# Altium PCB PCB1.PcbDoc
Units mm, origin at the board's own origin, x right, y up, seen from the top; angles counter-clockwise.
Board outline 65.15 x 80.26 mm, 2 copper layers (Top Layer, Bottom Layer); 8 components, 32 nets, 52 pads, 0 vias.
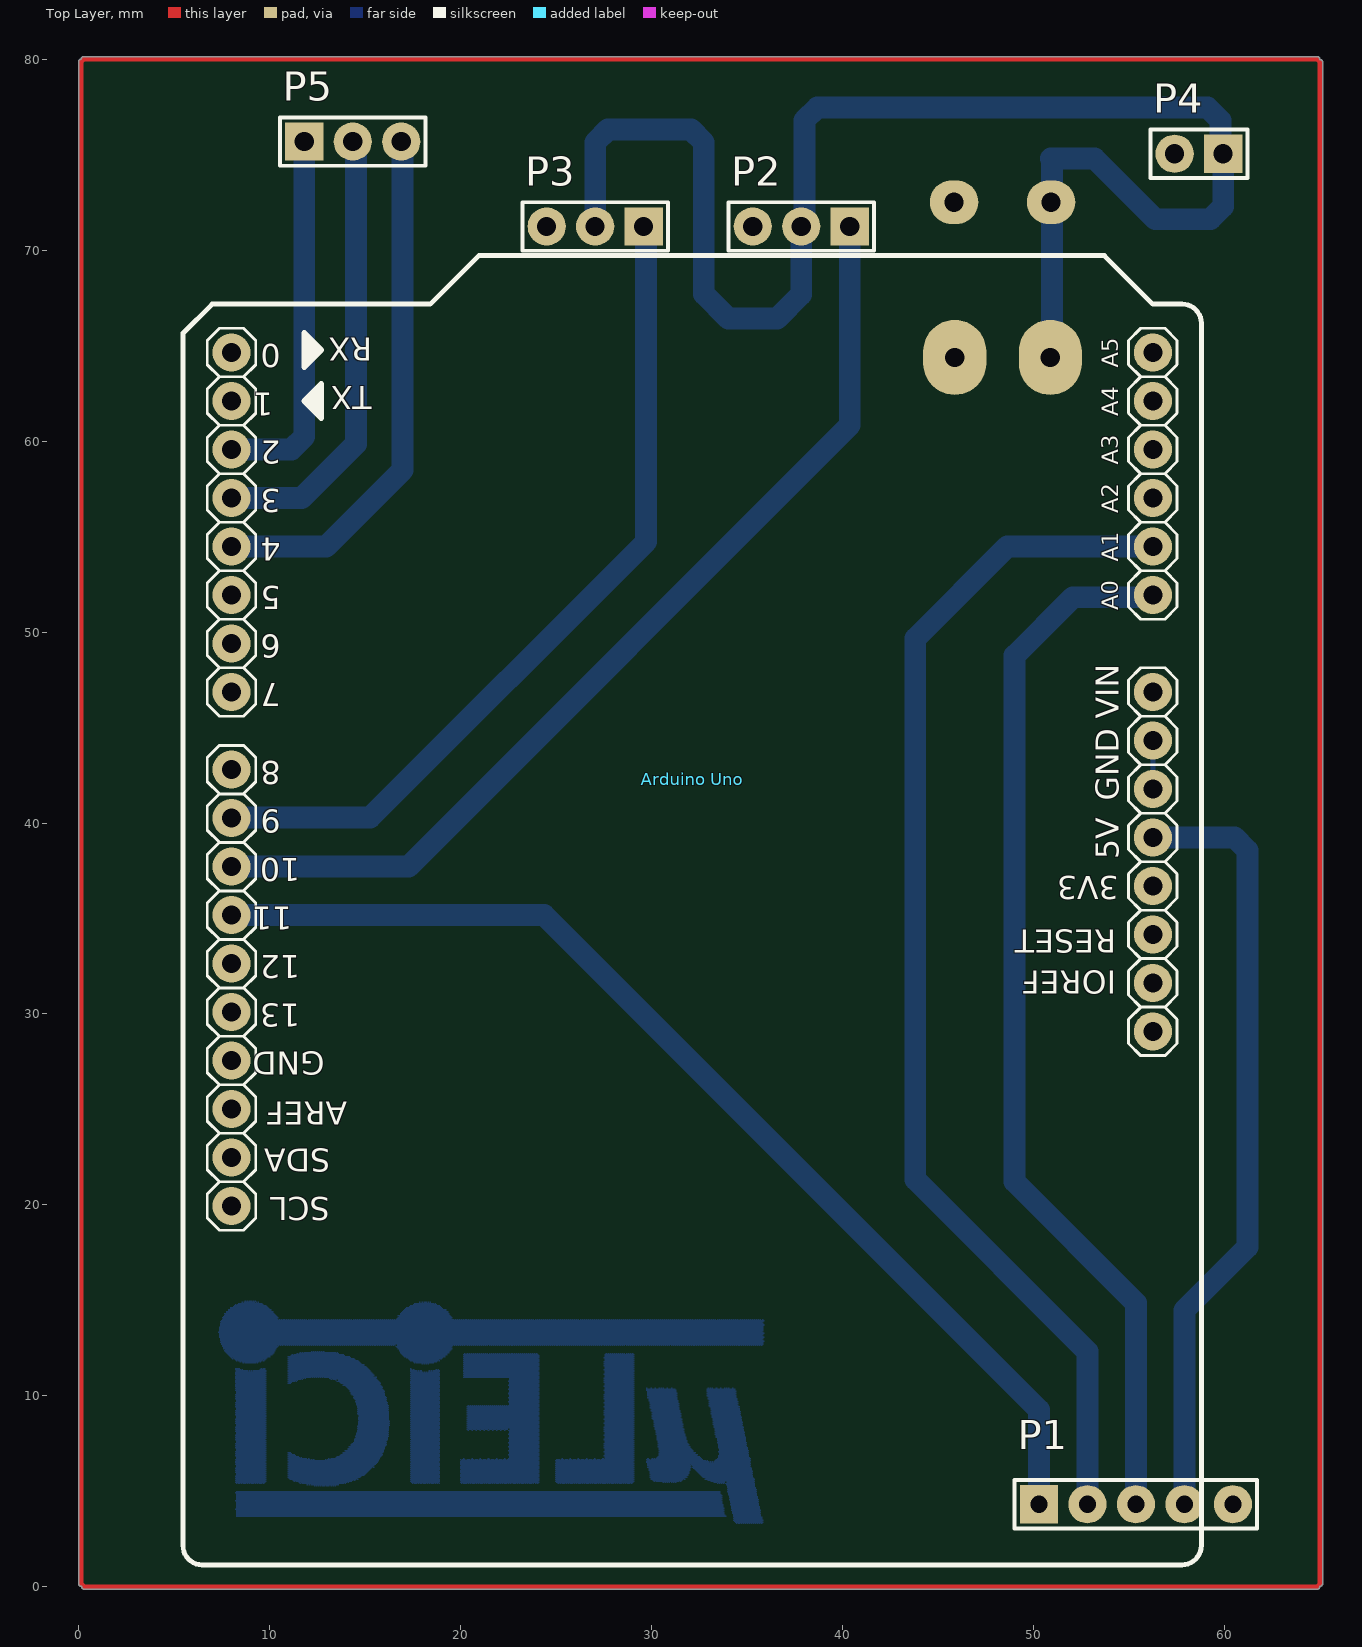
[diagram p0: Top Layer view]
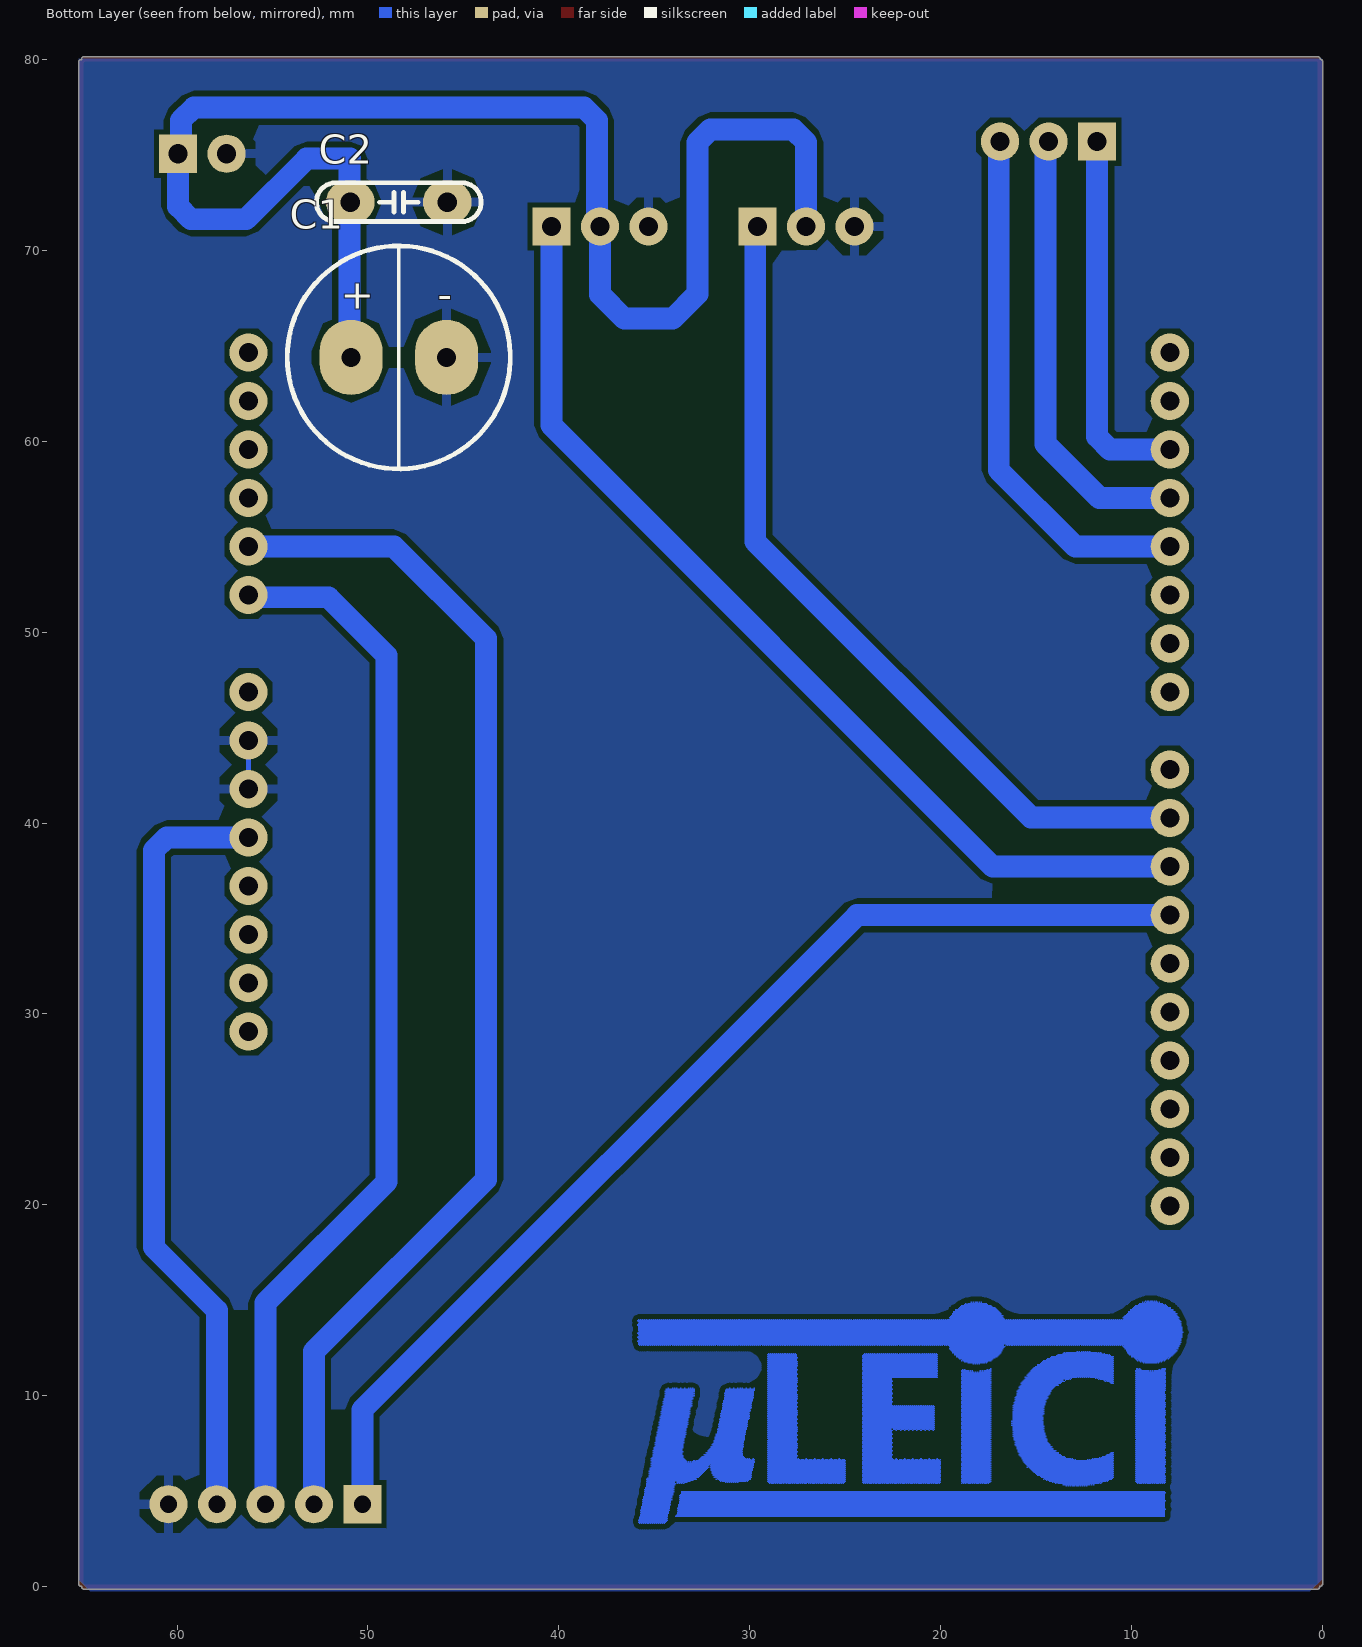
[diagram p1: Bottom Layer view, seen from below]

## Layer stack, top to bottom
Top Solder: solder mask 0.0102, Solder Resist, Dk 3.5
Top Layer: signal copper 0.0356
Dielectric 1: dielectric 0.32, FR-4, Dk 4.8
Bottom Layer: signal copper 0.0356
Bottom Solder: solder mask 0.0102, Solder Resist, Dk 3.5

## Board outline
0,0.149 0,79.883 cw(c0.127,79.883) 0.127,80.01 cw(c0.254,80.01) 0.254,80.137 64.875,80.137 cw(c64.875,80.01) 65.003,80.01 65,79.986 cw(c65.024,79.861) 65.151,79.861 65.151,0.149 cw(c65.024,0.149) 65,0.024 65.003,0 cw(c64.875,0) 64.875,-0.127 0.276,-0.127 cw(c0.276,0) 0.151,0.024 cw(c0.127,0.149)

## Design rules (kind name [scope] priority, off if disabled: settings)
Clearance [All] p1: gap=0.254 ignorepadtopadclearanceinfootprint=FALSE
PlaneClearance [All] p1: clearance=1
PlaneConnect [All] p1: planeconnectstyle=Relief reliefexpansion=1 reliefentries=4 reliefconductorwidth=1 reliefairgap=3
PolygonConnect [All] p1: connectstyle=Relief reliefconductorwidth=0.5 reliefentries=4 polygonreliefangle="90 Angle" airgapwidth=0.5
RoutingVias [All] p1: holewidth=0.711 width=1.27 viastyle="Through Hole" minholewidth=0.711 minwidth=1.27 maxholewidth=0.711 maxwidth=1.27
SolderMaskExpansion [All] p1: expansion=0.102 istentingtop=FALSE
Width [All] p1: maxlimit=1.27 minlimit=0.762 preferedwidth=1.143
28 further rules are at their usual default settings.

## Components (designator, comment, footprint, x,y, rotation, side; value= is the part's Value field where it differs from the comment)
"Arduino Uno" "ARDUINO UNO" "ARDUINO UNO" 32.261,37.203 r90 top
C1 "Capacitor polarizado" "CAP ELEC 10x16x5" 48.387,64.389 r180 bottom value=100u
C2 "Capacitor no polarizado" "Capacitor ceramico 0.2 inch pitch" 48.387,72.517 r0 bottom value=10n
P1 "joystik1" HDR1X5 50.292,4.318 r0 top
P2 "M2" HDR1X3 40.386,71.247 r180 top
P3 "M1" HDR1X3 29.591,71.247 r180 top
P4 "Fuente" HDR1X2 59.944,75.057 r180 top
P5 "fpga" HDR1X3 11.811,75.692 r0 top

## Footprints (in the part's own frame and the unit in brackets; to place one, negate y for a bottom-side part, rotate by r counter-clockwise, add the part's x,y. Pads: shape width x height; smd on the part's side, far side on the other; paste and mask are expansions set on the pad)
"ARDUINO UNO" [mm]
  round 2 hole 1: 0(27.44,24.26) 1(24.9,24.26) 2(22.36,24.26) 3(19.82,24.26) 3.3V(-0.5,-24) 4(17.28,24.26) 5(14.74,24.26) 5V(2.04,-24) 6(12.2,24.26) 7(9.66,24.26) 8(5.596,24.26) 9(3.056,24.26) 10(0.516,24.26) 11(-2.024,24.26) 12(-4.564,24.26) 13(-7.104,24.26) A0(14.74,-24) A1(17.28,-24) A2(19.82,-24) A3(22.36,-24) A4(24.9,-24) A5(27.44,-24) AREF(-12.184,24.26) GND1(7.12,-24) GND2(4.58,-24) GND3(-9.644,24.26) IOREF(-5.58,-24) NC(-8.12,-24) RST(-3.04,-24) SCL(-17.264,24.26) SDA(-14.724,24.26) Vin(9.66,-24)
  silkscreen extent -36.06,-26.54 32.52,26.8
"CAP ELEC 10x16x5" [mil]
  oval 130x155 hole 39.37: 1(-98.5,0) 2(98.5,0)
  silkscreen extent -230,-230 230,230, body extent -197,-197 197,197, height 630
"Capacitor ceramico 0.2 inch pitch" [mm]
  oval 2.54x2.286 hole 1: 1(-2.54,0) 2(2.54,0)
  silkscreen extent -4.31,-1.02 4.31,1.02, body extent -3.49,-0.85 3.5,0.85, height 7.82
HDR1X2 [mm] "Connector; Header; 2 Position"
  rect 2x2 hole 1: 1(0,0)
  round 2 hole 1: 2(2.54,0)
  silkscreen extent -1.27,-1.27 3.81,1.27
HDR1X3 [mm] "Connector; Header; 3 Position"
  rect 2x2 hole 1: 1(0,0)
  round 2 hole 1: 2(2.54,0) 3(5.08,0)
  silkscreen extent -1.27,-1.27 6.35,1.27
HDR1X5 [mm] "Connector; Header; 5 Position"
  rect 2x2 hole 0.9: 1(0,0)
  round 2 hole 0.9: 2(2.54,0) 3(5.08,0) 4(7.62,0) 5(10.16,0)
  silkscreen extent -1.27,-1.27 11.43,1.27

## Part data
P1: library part "Header 5", "Header, 5-Pin", LatestRevisionDate=17-Jul-2002, LatestRevisionNote="Re-released for DXP Platform.", Publisher="Altium Limited"
P2 P3 P5: library part "Header 3", "Header, 3-Pin", LatestRevisionDate=17-Jul-2002, LatestRevisionNote="Re-released for DXP Platform.", Publisher="Altium Limited"
P4: library part "Header 2", "Header, 2-Pin", LatestRevisionDate=17-Jul-2002, LatestRevisionNote="Re-released for DXP Platform.", Publisher="Altium Limited"

## Nets (pads, with @x,y where several pads share a name; then routed paths per layer and width w, separated by ;. In a path a pad name is that pad's centre, name@x,y a point inside that pad or via, vN(x,y) a via of type N, cw(c..) or ccw(c..) an arc to the next point about the centre after c; other vN are vias at no path point)
GND: "Arduino Uno.GND1" "Arduino Uno.GND2" C1.2 C2.1 P1.5 P2.3 P3.3 P4.2 | length 2.5
  Bottom Layer w0.254: 56.261,41.783 56.261,44.323
"NetArduino Uno_2": "Arduino Uno.2" P5.1 | length 19.7
  Bottom Layer w1.143: 7.874,59.563 11.141,59.563 11.811,60.233 P5.1
"NetArduino Uno_3": "Arduino Uno.3" P5.2 | length 23.6
  Bottom Layer w1.143: 8.001,57.023 11.684,57.023 14.515,59.854 14.515,75.528 P5.2
"NetArduino Uno_4": "Arduino Uno.4" P5.3 | length 27.8
  Bottom Layer w1.143: 8.001,54.483 12.954,54.483 16.959,58.488 16.959,75.58 P5.3@16.869,75.67
"NetArduino Uno_5V": "Arduino Uno.5V" P1.4 | length 41
  Bottom Layer w1.143: 56.173,39.155 56.261,39.243 60.544,39.243 61.214,38.573 61.214,17.78 57.912,14.478 P1.4
"NetArduino Uno_9": "Arduino Uno.9" P3.1 | length 44.1
  Bottom Layer w1.143: 8.001,40.259 8.034,40.292 15.273,40.292 29.718,54.737 P3.1@29.718,71.128
"NetArduino Uno_10": "Arduino Uno.10" P2.1 | length 52.4
  Bottom Layer w1.143: 8.001,37.719 17.272,37.719 40.386,60.833 P2.1
"NetArduino Uno_11": "Arduino Uno.11" P1.1 | length 58
  Bottom Layer w1.143: 8.001,35.179 24.384,35.179 50.292,9.271 P1.1
"NetArduino Uno_A0": "Arduino Uno.A0" P1.3 | length 55.6
  Bottom Layer w1.143: P1.3 55.372,14.859 49.022,21.209 49.022,48.768 52.076,51.822 56.14,51.822 56.261,51.943
"NetArduino Uno_A1": "Arduino Uno.A1" P1.2 | length 63.5
  Bottom Layer w1.143: P1.2 52.832,12.319 43.815,21.336 43.815,49.657 48.641,54.483 56.261,54.483
NetC1_1: C1.1 C2.2 P2.2 P3.2 P4.1 | length 80.5
  Bottom Layer w1.143: P3.2 27.051,75.657 27.721,76.327 32.072,76.327 32.741,75.657 32.741,67.716 34.036,66.421 36.576,66.421 37.846,67.691 P2.2 ; P2.2@37.914,71.315 38.01,71.411 38.01,76.8 38.68,77.47 59.129,77.47 59.799,76.8 59.799,75.202 P4.1 59.944,72.298 59.274,71.628 56.388,71.628 53.213,74.803 50.927,74.803 50.971,74.759 50.971,73.152 50.971,72.263 50.971,65.703 C1.1@51.016,65.659
NetP7_2: 
NetP7_20: 
NetP7_22: 
NetP7_24: 
NetP7_29: 
NetP7_38: 
NetP8_2: 
NetP8_4: 
NetP8_5: 
NetP8_6: 
NetP8_7: 
NetP8_9: 
NetP8_11: 
NetP8_13: 
NetP8_15: 
NetP8_29: 
NetP8_31: 
NetP8_33: 
NetP8_35: 
NetP8_37: 
NetP8_39: 
pads on no net: "Arduino Uno.0" "Arduino Uno.1" "Arduino Uno.3.3V" "Arduino Uno.5" "Arduino Uno.6" "Arduino Uno.7" "Arduino Uno.8" "Arduino Uno.12" "Arduino Uno.13" "Arduino Uno.A2" "Arduino Uno.A3" "Arduino Uno.A4" "Arduino Uno.A5" "Arduino Uno.AREF" "Arduino Uno.GND3" "Arduino Uno.IOREF" "Arduino Uno.NC" "Arduino Uno.RST" "Arduino Uno.SCL" "Arduino Uno.SDA" "Arduino Uno.Vin"
copper on no net: | length 289.5
  Top Layer w0.254: 0.127,0.149 0.276,0 59.309,0 64.875,0 65.024,0.149 65.024,79.861 64.875,80.01 0.254,80.01 0.127,79.883 0.127,0.149

## Polygon pours and split planes (outlines as drawn)
GND on Bottom Layer "gnd" (solid, remove dead copper, pour order 0): 0,0 0,74.944 cw(c0.127,74.944) 0,74.945 0.033,80.024 65.151,80.024 65.151,0.141 65.114,0.051 64.86,-0.203 64.77,-0.24 0.276,-0.24 0.215,-0.215

## Other copper
Bottom Layer:
  region: 33.593,4.951 33.593,4.898 33.593,4.844 33.647,4.844 33.647,4.79 33.7,4.79 33.7,4.737 33.647,4.737 33.647,4.683 33.7,4.683 33.7,4.63 33.647,4.63 33.647,4.576 33.7,4.576 33.7,4.523 33.647,4.523 33.647,4.469 33.7,4.469 33.7,4.416 33.7,4.362 33.7,4.308 33.754,4.308 33.754,4.255 33.754,4.201 33.754,4.148 33.807,4.148 33.807,4.094 33.754,4.094 33.754,4.041 33.807,4.041 33.807,3.987 33.754,3.987 33.754,3.934 33.807,3.934 33.807,3.88 33.807,3.826 33.807,3.773 33.861,3.773 33.861,3.719 33.915,3.719 33.915,3.666 8.261,3.666 8.261,3.719 8.261,3.773 8.261,3.826 8.261,3.88 8.261,3.934 8.261,3.987 8.261,4.041 8.208,4.041 8.208,4.094 8.261,4.094 8.261,4.148 8.261,4.201 8.261,4.255 8.261,4.308 8.261,4.362 8.261,4.416 8.261,4.469 8.208,4.469 8.208,4.523 8.261,4.523 8.261,4.576 8.261,4.63 8.261,4.683 8.261,4.737 8.261,4.79 8.261,4.844 8.261,4.898 8.208,4.898 8.208,4.951 8.261,4.951 8.261,5.005 33.593,5.005
  region: 952 vertices and 1 holes, not listed, extent 29.737,3.291 35.843,10.414
  region: 20.365,8.218 20.418,8.218 20.418,8.164 20.365,8.164 20.365,8.218 20.311,8.218 20.311,8.272 20.365,8.272
  region: 489 vertices and 0 holes, not listed, extent 8.208,5.38 9.814,11.431
  region: 479 vertices and 0 holes, not listed, extent 17.366,5.38 18.919,11.431
  region: 737 vertices and 1 holes, not listed, extent 10.939,5.272 16.295,12.342
  region: 889 vertices and 1 holes, not listed, extent 19.99,5.38 24.114,12.235
  region: 701 vertices and 0 holes, not listed, extent 24.971,5.38 29.094,12.235
  region: 2127 vertices and 1 holes, not listed, extent 7.297,11.646 35.896,14.966

## Text inside footprints (layer, text, board x,y; h text height)
"Arduino Uno": Top Overlay "SDA" at 13.174,22.932 h1.21 r180; Top Overlay "SCL" at 13.161,20.403 h1.21 r180; Top Overlay "0" at 10.585,65.09 h1.21 r180; Top Overlay "1" at 10.182,62.55 h1.21 r180; Top Overlay "2" at 10.585,60.01 h1.21 r180; Top Overlay "3" at 10.585,57.47 h1.21 r180; Top Overlay "4" at 10.585,54.93 h1.21 r180; Top Overlay "5" at 10.585,52.39 h1.21 r180; Top Overlay "6" at 10.585,49.85 h1.21 r180; Top Overlay "7" at 10.585,47.31 h1.21 r180; Top Overlay "8" at 10.585,43.246 h1.21 r180; Top Overlay "9" at 10.585,40.706 h1.21 r180; Top Overlay "10" at 11.592,38.166 h1.21 r180; Top Overlay "11" at 11.189,35.626 h1.21 r180; Top Overlay "12" at 11.592,33.086 h1.21 r180; Top Overlay "13" at 11.592,30.546 h1.21 r180; Top Overlay "RX" at 15.367,65.405 h1.21 r180; Top Overlay "TX" at 15.342,62.865 h1.21 r180; Top Overlay "IOREF" at 54.356,32.258 h1.21 r180; Top Overlay "GND" at 54.483,41.173 h1.21 r90; Top Overlay "VIN" at 54.483,45.466 h1.21 r90; Top Overlay "A5" at 54.458,63.856 h0.86 r90; Top Overlay "A4" at 54.458,61.316 h0.86 r90; Top Overlay "A3" at 54.458,58.776 h0.86 r90; Top Overlay "A2" at 54.458,56.236 h0.86 r90; Top Overlay "A1" at 54.458,53.696 h0.86 r90; Top Overlay "3V3" at 54.483,37.211 h1.21 r180; Top Overlay "RESET" at 54.356,34.417 h1.21 r180; Top Overlay "GND" at 12.875,28.031 h1.21 r180; Top Overlay "AREF" at 14.058,25.389 h1.21 r180; Top Overlay "A0" at 54.458,51.156 h0.86 r90; Top Overlay "5V" at 54.483,38.1 h1.21 r90
C1: Bottom Overlay "-" at 46.355,66.929 h1.52; Bottom Overlay "+" at 51.435,66.929 h1.52